# Altium PCB Receiver_PCB.PcbDoc
Units mm, origin at the board's own origin, x right, y up, seen from the top; angles counter-clockwise.
Board outline 78.87 x 88.65 mm, 2 copper layers (Top Layer, Bottom Layer); 16 components, 35 nets, 105 pads, 10 vias.
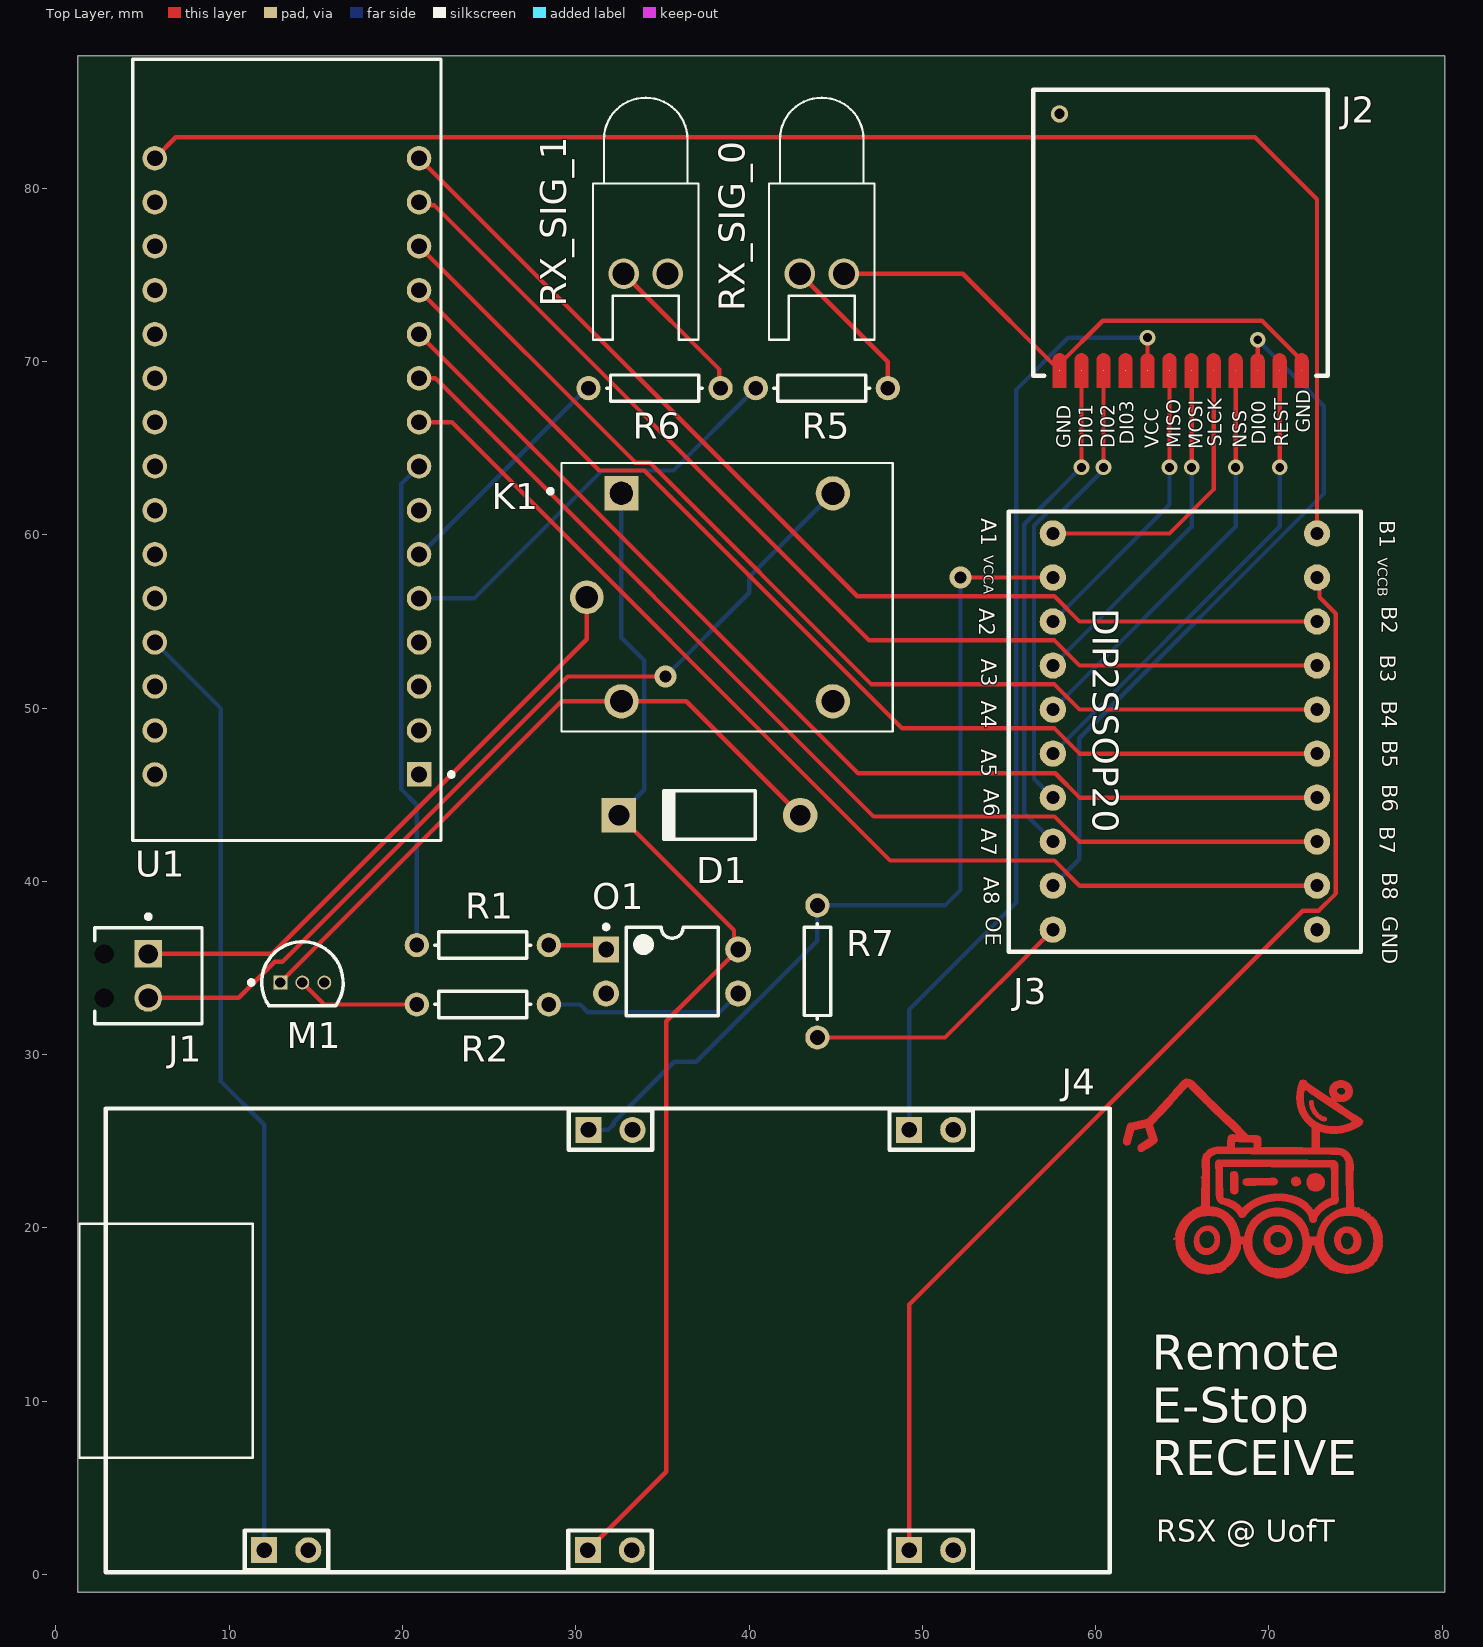
[diagram p0: Top Layer view]
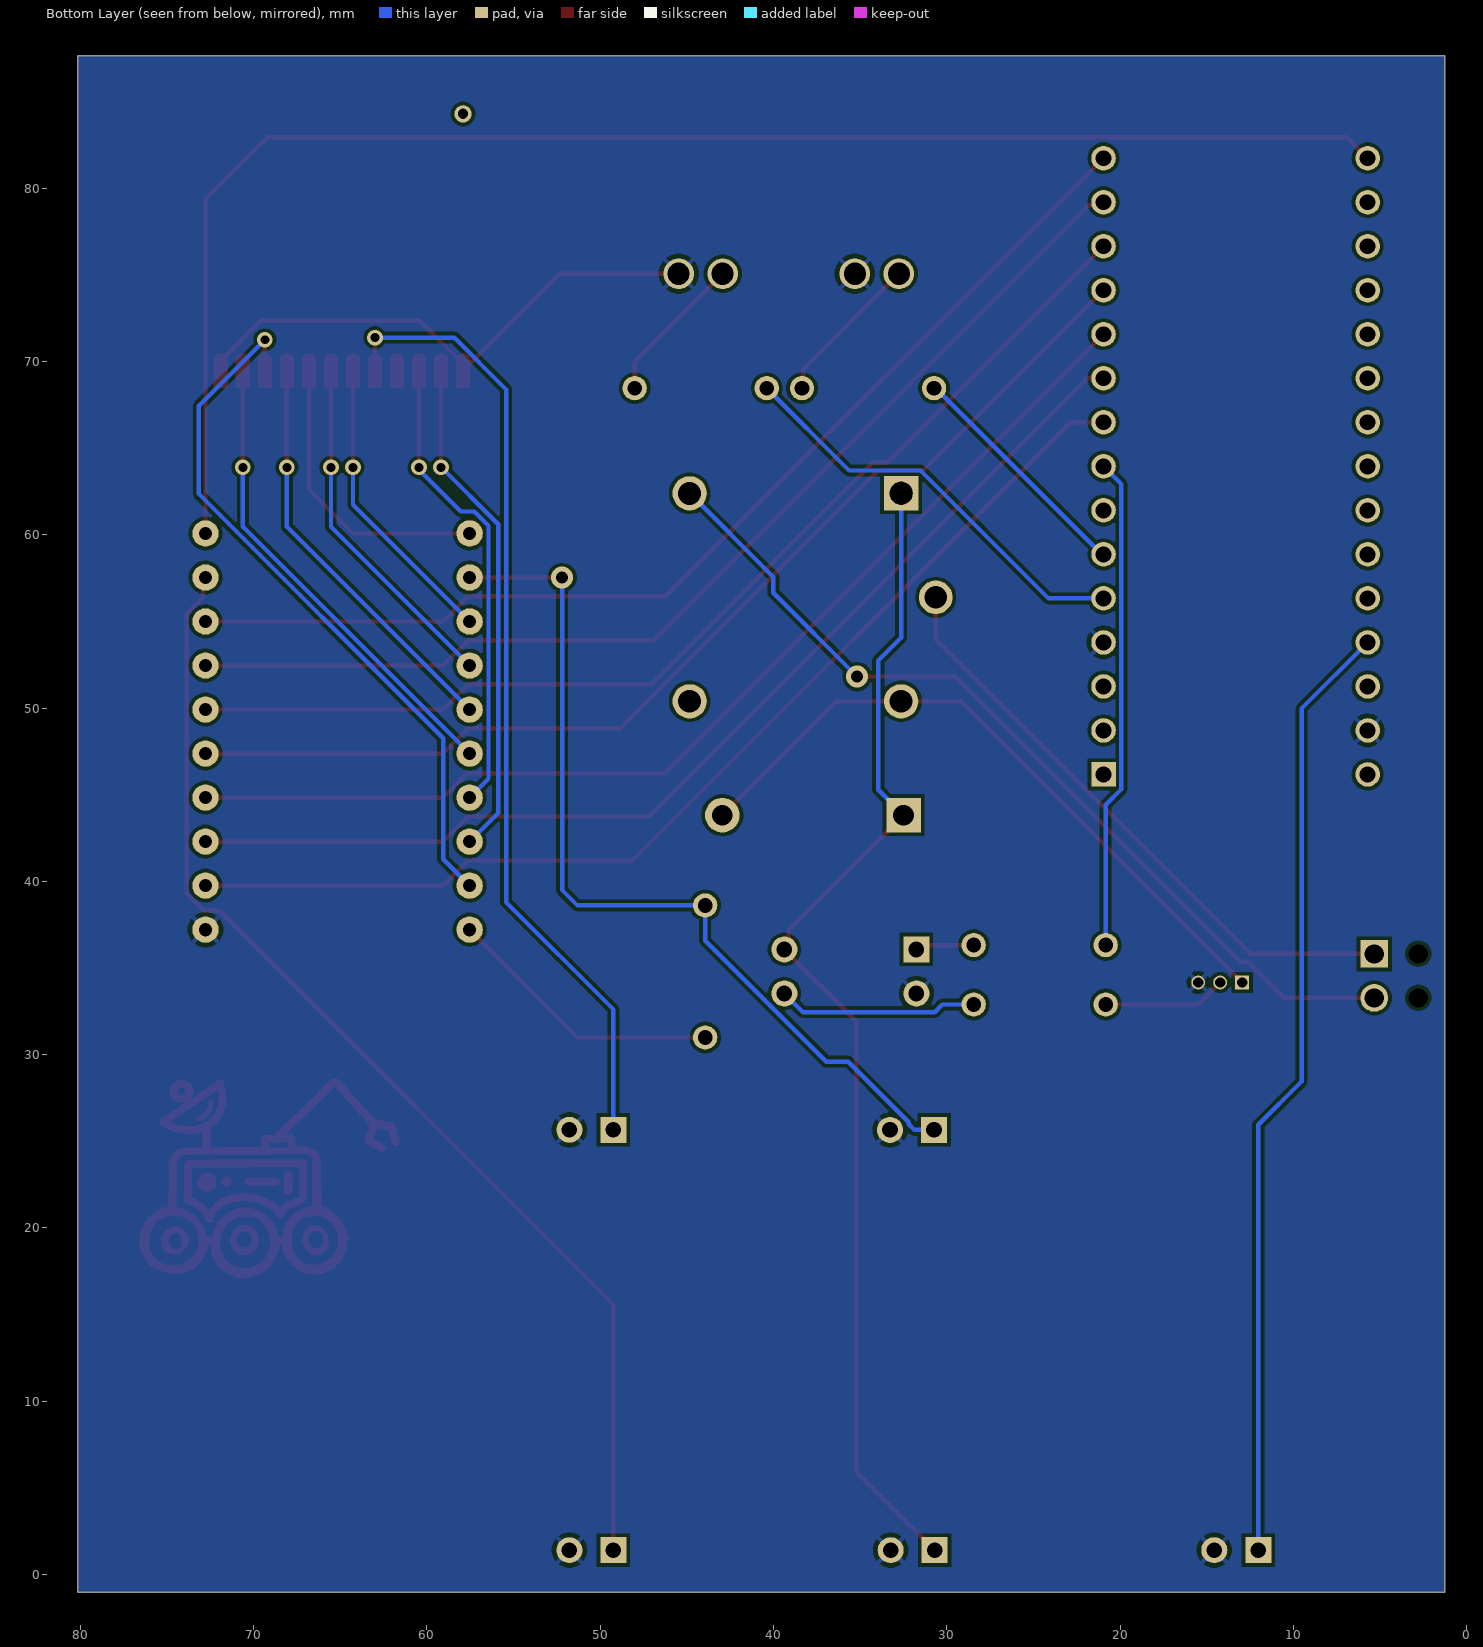
[diagram p1: Bottom Layer view, seen from below]

## Layer stack, top to bottom
Top Solder: solder mask 0.0102, Solder Resist, Dk 3.5
Top Layer: signal copper 0.0356
Dielectric 1: dielectric 0.32, FR-4, Dk 4.8
Bottom Layer: signal copper 0.0356
Bottom Solder: solder mask 0.0102, Solder Resist, Dk 3.5

## Board outline
1.27,-1.016 80.137,-1.016 80.137,87.63 1.27,87.63

## Design rules (kind name [scope] priority, off if disabled: settings)
Clearance [All] p1: gap=0.2 ignorepadtopadclearanceinfootprint=FALSE
PolygonConnect [All] p1: connectstyle=Relief reliefconductorwidth=0.254 reliefentries=4 polygonreliefangle="45 Angle" airgapwidth=0.254
RoutingVias [All] p1: holewidth=0.711 width=1.27 viastyle="Through Hole" minholewidth=0.3 minwidth=0.5 maxholewidth=0.711 maxwidth=1.27
SilkToSolderMaskClearance [IsPad] p1: minsilkscreentomaskgap=0.15 clearancetoexposedcopper=TRUE
SolderMaskExpansion [All] p1: expansion=0.102 istentingtop=FALSE
Width [All] p1: maxlimit=0.254 minlimit=0.254 preferedwidth=0.254
29 further rules are at their usual default settings.

## Components (designator, comment, footprint, x,y, rotation, side; value= is the part's Value field where it differs from the comment)
D1 "Diode 1N4007" DO-41 37.719,43.815 r180 top
J1 "1725656" PHOE-1725656-2 5.334,34.544 r270 top
J2 "Header 12" "LORA SX1278" 56.388,69.169 r0 top
J3 "Logic_Shift" DIP2SSOP20 72.771,60.071 r270 top
J4 "Header 6X2" "3.3V/5V BATTERY SHIELD" 2.881,0.136 r0 top
K1 "SRD-05VDC-SL-C" RELAY_SRD-05VDC-SL-C 38.735,56.388 r0 top
M1 "P2N2222AG" ONSC-TO-92-3-29-11 14.224,34.163 r0 top
O1 "LTV-817" LTST-LTV-817-4 35.56,34.798 r0 top
R1 "Res1" AXIAL-0.3 24.638,36.322 r180 top value=1K
R2 "Res1" AXIAL-0.3 24.638,32.893 r180 top value=1K
R5 "Res1" AXIAL-0.3 44.196,68.453 r180 top value=1K
R6 "Res1" AXIAL-0.3 34.544,68.453 r180 top value=1K
R7 "Res1" AXIAL-0.3 43.942,34.798 r90 top value=1K
RX_SIG_0 "Green_LED" LED-0 44.196,75.057 r180 top
RX_SIG_1 "Red_LED" LED-0 34.036,75.057 r180 top
U1 "A000005" FP-A000005-MFG 13.335,64.897 r180 top

## Footprints (in the part's own frame and the unit in brackets; to place one, negate y for a bottom-side part, rotate by r counter-clockwise, add the part's x,y. Pads: shape width x height; smd on the part's side, far side on the other; paste and mask are expansions set on the pad)
"3.3V/5V BATTERY SHIELD" [mm]
  rect 1.5x1.5 hole 0.9: 1(9.144,1.27) 2(27.853,25.518) 5(27.813,1.27) 6(46.355,25.527) 9(46.355,1.27)
  round 1.5 hole 0.9: 3(11.684,1.27) 4(30.393,25.518) 7(30.353,1.27) 8(48.895,25.527) 11(48.895,1.27)
  silkscreen extent -1.52,0 57.94,26.75
AXIAL-0.3 [mm] "Axial Device, Thru-Hole; 2 Leads; 0.3 in Pin Spacing"
  round 1.4 hole 0.85: 1(-3.81,0) 2(3.81,0)
  silkscreen extent -2.77,-0.76 2.77,0.76
DIP2SSOP20 [mil]
  round 60 hole 30: 1(0,-600) 2(100,-600) 3(200,-600) 4(300,-600) 5(400,-600) 6(500,-600) 7(600,-600) 8(700,-600) 9(800,-600) 10(900,-600) 11(900,0) 12(800,0) 13(700,0) 14(600,0) 15(500,0) 16(400,0) 17(300,0) 18(200,0) 19(100,0) 20(0,0)
  silkscreen extent -50,-700 950,100
DO-41 [mm] "Diode, Axial; Body 5.2 x 2.7 mm (LxDia. max), Lead Dia. 0.86 mm (max)"
  round 2 hole 1.2: 1(-5.23,0)
  rect 2x2 hole 1.2: 2(5.23,0)
  silkscreen extent -2.65,-1.4 2.75,1.4
FP-A000005-MFG [mil]
  rect 55.67x55.67 hole 35.98 paste-39370.1 mask+0: 1(-300,737.5)
  round 55.67 hole 35.98 paste-39370.1 mask+0: 2(-300,637.5) 3(-300,537.5) 4(-300,437.5) 5(-300,337.5) 6(-300,237.5) 7(-300,137.5) 8(-300,37.5) 9(-300,-62.5) 10(-300,-162.5) 11(-300,-262.5) 12(-300,-362.5) 13(-300,-462.5) 14(-300,-562.5) 15(-300,-662.5) 16(300,-662.5) 17(300,-562.5) 18(300,-462.5) 19(300,-362.5) 20(300,-262.5) 21(300,-162.5) 22(300,-62.5) 23(300,37.5) 24(300,137.5) 25(300,237.5) 26(300,337.5) 27(300,437.5) 28(300,537.5) 29(300,637.5) 30(300,737.5)
  silkscreen extent -379,-888 350,888, body extent -354,-891 354,891, height 10
LED-0 [mil] "LED; 2 Leads"
  round 70 hole 50: 1(50,0) 2(-50,0)
  silkscreen extent -120,-400 120,150
"LORA SX1278" [mil]
  round 1 smd: 1(610,11.81) 2(560,11.81) 3(510,11.81) 4(460,11.81) 5(410,11.81) 6(360,11.81) 7(310,11.81) 8(260,11.81) 9(210,11.81) 10(160,11.81) 11(110,11.81) 12(60,11.81)
  round 39.37 hole 23.62: ANT(60,595)
  Top Layer region: 44.25,-27.56 75.75,-27.56 75.75,35.43 74.55,41.46 71.14,46.57 66.03,49.98 60,51.18 60,51.18 53.97,49.98 48.86,46.57 45.45,41.46 44.25,35.43 44.25,35.43
  Top Layer region: 144.25,-27.56 175.75,-27.56 175.75,35.43 174.55,41.46 171.14,46.57 166.03,49.98 160,51.18 160,51.18 153.97,49.98 148.86,46.57 145.45,41.46 144.25,35.43 144.25,35.43
  Top Layer region: 94.25,-27.56 125.75,-27.56 125.75,35.43 124.55,41.46 121.14,46.57 116.03,49.98 110,51.18 110,51.18 103.97,49.98 98.86,46.57 95.45,41.46 94.25,35.43 94.25,35.43
  Top Layer region: 544.25,-27.56 575.75,-27.56 575.75,35.43 574.55,41.46 571.14,46.57 566.03,49.98 560,51.18 560,51.18 553.97,49.98 548.86,46.57 545.45,41.46 544.25,35.43 544.25,35.43
  Top Layer region: 494.25,-27.56 525.75,-27.56 525.75,35.43 524.55,41.46 521.14,46.57 516.03,49.98 510,51.18 510,51.18 503.97,49.98 498.86,46.57 495.45,41.46 494.25,35.43 494.25,35.43
  Top Layer region: 444.25,-27.56 475.75,-27.56 475.75,35.43 474.55,41.46 471.14,46.57 466.03,49.98 460,51.18 460,51.18 453.97,49.98 448.86,46.57 445.45,41.46 444.25,35.43 444.25,35.43
  Top Layer region: 394.25,-27.56 425.75,-27.56 425.75,35.43 424.55,41.46 421.14,46.57 416.03,49.98 410,51.18 410,51.18 403.97,49.98 398.86,46.57 395.45,41.46 394.25,35.43 394.25,35.43
  Top Layer region: 344.25,-27.56 375.75,-27.56 375.75,35.43 374.55,41.46 371.14,46.57 366.03,49.98 360,51.18 360,51.18 353.97,49.98 348.86,46.57 345.45,41.46 344.25,35.43 344.25,35.43
  Top Layer region: 294.25,-27.56 325.75,-27.56 325.75,35.43 324.55,41.46 321.14,46.57 316.03,49.98 310,51.18 310,51.18 303.97,49.98 298.86,46.57 295.45,41.46 294.25,35.43 294.25,35.43
  Top Layer region: 244.25,-27.56 275.75,-27.56 275.75,35.43 274.55,41.46 271.14,46.57 266.03,49.98 260,51.18 260,51.18 253.97,49.98 248.86,46.57 245.45,41.46 244.25,35.43 244.25,35.43
  Top Layer region: 194.25,-27.56 225.75,-27.56 225.75,35.43 224.55,41.46 221.14,46.57 216.03,49.98 210,51.18 210,51.18 203.97,49.98 198.86,46.57 195.45,41.46 194.25,35.43 194.25,35.43
  Top Layer region: 594.25,-27.56 625.75,-27.56 625.75,35.43 624.55,41.46 621.14,46.57 616.03,49.98 610,51.18 610,51.18 603.97,49.98 598.86,46.57 595.45,41.46 594.25,35.43 594.25,35.43
  silkscreen extent 0,0 669,650
LTST-LTV-817-4 [mm] "DIP, 4-Leads, Body 7x5.1mm, Pitch 2.54mm"
  rect 1.5x1.5 hole 0.9: 1(-3.81,1.27)
  round 1.5 hole 0.9: 2(-3.81,-1.27) 3(3.81,-1.27) 4(3.81,1.27)
  silkscreen extent -3.93,-2.55 2.65,2.69, body extent -3.95,-2.55 3.95,2.55, height 4.5
ONSC-TO-92-3-29-11 [mm] "TO, 3-Leads, Body Dia 4.7mm, Pitch 1.27mm"
  rect 0.8x0.8 hole 0.6: 1(-1.27,0)
  round 0.8 hole 0.6 paste+0: 2(0,0)
  round 0.8 hole 0.6: 3(1.27,0)
  silkscreen extent -3.07,-1.34 2.35,2.35, body extent -2.35,-1.33 2.36,2.36, height 7.87
PHOE-1725656-2 [mm] "Connector, 2-Leads, Body 6.2x5.4mm, Pitch 2.54mm"
  rect 1.6x1.6 hole 1.1: 1(-1.27,0)
  round 1.6 hole 1.1: 2(1.27,0)
  round 0 hole 1.1 unplated: MH1(-1.27,-2.54) MH2(1.27,-2.54)
  silkscreen extent -3.54,-3.1 2.77,3.1, body extent -2.77,-3.1 2.77,3.1, height 9
RELAY_SRD-05VDC-SL-C [mm]
  rect 1.98x1.98 hole 1.32 paste+0: A1(-6.1,6)
  round 1.98 hole 1.32: A2(-6.1,-6) NC(6.1,6) NO(6.1,-6)
  round 1.935 hole 1.29: COM(-8.1,0)
  silkscreen extent -10.3,-7.75 9.55,7.75, body extent -9.6,-7.8 9.6,7.8, height 15.8

## Part data
D1: "1 Amp General Purpose Rectifier", Code_JEDEC=DO-204-AL, ComponentLink1Description="Manufacturer Link", ComponentLink1URL=http://www.fairchildsemi.com/, ComponentLink2Description=Datasheet, ComponentLink2URL=http://www.fairchildsemi.com/ds/1N%2F1N4001.pdf, DatasheetVersion=1998, LatestRevisionDate=17-Jul-2002, LatestRevisionNote="Re-released for DXP Platform.", PackageDescription="Diode, Axial; Body 5.2 x 2.7 mm (LxDia. max), Lead Dia. 0.86 mm (max)", PackageReference=DO-41, PackageVersion=Aug-1999, Published=8-Jun-2000, Publisher="Altium Limited"
J1: library part CMP-2000-05299-1, "Male Header, Pitch 2.54 mm, 1 x 2 Position, Height 9 mm, Tail Length 3.5 mm", Colour=Green, Manufacturer="Phoenix Contact", Content=250pc(s), Datasheet URL=http://datasheet.octopart.com/1725656-Phoenix-Contact-datasheet-5302866.pdf, Datasheet Version=Apr-08, Industrial packaging=Yes, Manufacturer part No.=1725656, Manufacturer URL=http://www.phoenixcontact.com/, Number of Contacts=2, Pitch=2.54mm, Type=MPT0,5/2-2,54
J2: "Header, 12-Pin", LatestRevisionDate=17-Jul-2002, LatestRevisionNote="Re-released for DXP Platform.", Publisher="Altium Limited"
J3: library part "Header 10X2", "Header, 10-Pin, Dual row", LatestRevisionDate=17-Jul-2002, LatestRevisionNote="Re-released for DXP Platform.", Publisher="Altium Limited"
J4: "Header, 6-Pin, Dual row", LatestRevisionDate=17-Jul-2002, LatestRevisionNote="Re-released for DXP Platform.", Publisher="Altium Limited"
K1: "5V Trigger Relay Module For Arduino And Raspberry Pi 5V Trigger Relay Module For Arduino And Raspberry Pi", Package="NON STANDARD-5 Songle Relay", Availability="Not in stock", Check_prices=https://www.snapeda.com/parts/SRD-05VDC-SL-C/Songle+Relay/view-part/?ref=eda, MF="Songle Relay", MP=SRD-05VDC-SL-C, Price=None, SnapEDA_Link=https://www.snapeda.com/parts/SRD-05VDC-SL-C/Songle+Relay/view-part/?ref=snap
M1: library part CMP-1048-01402-1, "Amplifier Transistor, NPN Silicon, 3-Pin TO-92, Pb-Free, Bulk Box", Manufacturer="On Semiconductor", ComponentLink1Description="Manufacturer URL", ComponentLink1URL=http://www.onsemi.com/, ComponentLink2Description=Datasheet, ComponentLink2URL=http://www.onsemi.com/pub_link/Collateral/P2N2222A-D.PDF, ComponentLink3Description="Package Specification", ComponentLink3URL=http://www.onsemi.cn/pub_link/Collateral/2N6426-D.PDF, DatasheetVersion="Rev. 7", fT Min (MHz)=300, IC Continuous (A)=0.6, Mounting Technology="Through Hole", PackageDescription="3-Pin Transistor Outline, Body 4.825 x 3.685 mm, Pitch 1.27 mm", PackageReference=TO-92-3-29-11_AM_SL, PackageVersion="Rev. AM", Packing="Bulk Box", PartNumber=P2N2222AG, Polarity=NPN, RoHS=TRUE
O1: library part CMP-2000-06632-1, "Photocoupuler, 50 mA Forward Current, 1.2 V Forward Voltage, -50 to 110 degC, 4-Pin DIP, RoHS, Tube", Manufacturer=Lite-On, Maximum Collector Current=50mA, Maximum Collector Emitter Saturation Voltage=200mV, Maximum Collector Emitter Voltage=35V, Maximum Current Transfer Ratio=600%, Maximum Forward Voltage=1.4V, Maximum Operating Temperature=100C, Maximum Power Dissipation=200mW, Maximum Reverse Voltage=6V, Minimum Current Transfer Ratio=50%, Minimum Isolation Voltage=5000Vrms, Minimum Operating Temperature=-30C, Package Description="4-Pin Double In-line Package, Body 6.5 x 4.6 mm, Pitch 2.54 mm", Supplier_Package=PDIP, Typical Forward Voltage=1.2V, Datasheet URL=http://optoelectronics.liteon.com/upload/download/DS70-2012-0050/S_110_LTV-8X7%20series%200915.pdf, Datasheet Version="Rev. E, 10/2015", Family=LTV817, Input Type=DC, Manufacturer URL=http://www.us.liteon.com/, Maximum Fall Time=18us, Maximum Input Current=50mA, Maximum Rise Time=18us, Mounting=ThroughHole, Mounting Technology=ThroughHole, Number of Channels per Chip=1, Output Device=Transistor, Output Type=DC, Package Reference=LTV-817, Pin_Count=4, Product Height=3.5mm, Product Length=4.6mm, Product Type=TransistorandPhotovoltaicOutputPhotoCouplers, Product Width=6.5mm, Typical Fall Time=3us, Typical Rise Time=4us
R1 R2 R5 R6 R7: "Resistor", LatestRevisionDate=17-Jul-2002, LatestRevisionNote="Re-released for DXP Platform.", PackageDescription="Axial Device, Thru-Hole; 2 Leads; 0.3 in Pin Spacing", PackageReference=AXIAL-0.3, Published=8-Jun-2000, Publisher="Altium Limited"
RX_SIG_0 RX_SIG_1: library part LED0, "Typical INFRARED GaAs LED", LatestRevisionDate=08-Jul-2005, LatestRevisionNote="Mech Layer 1 removed.", PackageDescription="LED; 2 Leads", PackageReference=LED-0, Published=8-Jun-2000, Publisher="Altium Limited"
U1: library part CMP-189986-000002-1, "ARDUINO NANO ATMEGA328 EVAL BRD", Operating Supply Voltage=12V, Package Quantity=50, Core Architecture=AVR, Data Bus Width=8b, Evaluation Kit=Yes, Height=0.25inch, Interface=I2C, Length=7inch, Number of Bits=8, Packaging=Bulk, REACH SVHC="No SVHC", Series="AVR® ATmega", Weight=0.358383oz, Width=5inch

## Via types
v1: diameter 0.9, hole 0.5, Top Layer to Bottom Layer, 8 vias
v2: diameter 1.27, hole 0.711, Top Layer to Bottom Layer, 2 vias

## Nets (pads, with @x,y where several pads share a name; then routed paths per layer and width w, separated by ;. In a path a pad name is that pad's centre, name@x,y a point inside that pad or via, vN(x,y) a via of type N, cw(c..) or ccw(c..) an arc to the next point about the centre after c; other vN are vias at no path point)
DI03: J2.9
GND: J2.1 J2.12 J3.11 J4.3 J4.4 J4.7 J4.8 J4.11 M1.3 O1.2 RX_SIG_0.2 RX_SIG_1.2 U1.4 U1.29 | length 31.7
  Top Layer w0.254: RX_SIG_0.2 52.324,75.057 J2.12 57.912,69.85 60.412,72.35 69.592,72.35 71.882,70.06 J2.1
NetD1_1: D1.1 K1.A2 M1.1 | length 39.4
  Top Layer w0.254: M1.1 29.179,50.388 K1.A2 36.376,50.388 D1.1
NetD1_2: D1.2 J4.5 K1.A1 O1.4 | length 68.6
  Top Layer w0.254: J4.5 35.224,5.936 35.224,31.922 O1.4 39.132,36.306 39.132,37.172 D1.2
  Bottom Layer w0.254: D1.2 33.952,45.278 33.952,52.743 32.635,54.06 K1.A1
NetJ1_1: J1.1 K1.COM | length 35.2
  Top Layer w0.254: J1.1 12.481,35.814 30.635,53.968 K1.COM
NetJ1_2: J1.2 K1.NC | length 52.1
  Top Layer w0.254: J1.2 10.553,33.274 12.639,35.36 13.074,35.36 29.53,51.816 v2(35.179,51.816)
  Bottom Layer w0.254: v2(35.179,51.816) 40.008,56.645 40.008,57.561 K1.NC
NetJ2_2: J2.2 J3.6 | length 27.5
  Top Layer w0.254: v1(70.612,63.881) J2.2
  Bottom Layer w0.254: J3.6 70.612,60.452 v1(70.612,63.881)
NetJ2_3: J2.3 J3.9 | length 41.3
  Top Layer w0.254: J2.3 v1(69.342,71.247)
  Bottom Layer w0.254: J3.9 59.055,41.275 59.055,48.253 73.152,62.35 73.152,67.437 v1(69.342,71.247)
NetJ2_4: J2.4 J3.5 | length 23.9
  Top Layer w0.254: v1(68.072,63.881) J2.4
  Bottom Layer w0.254: J3.5 68.072,60.452 v1(68.072,63.881)
NetJ2_5: J2.5 J3.1 | length 17.2
  Top Layer w0.254: J3.1 64.262,60.071 66.802,62.611 J2.5
NetJ2_6: J2.6 J3.4 | length 20.3
  Top Layer w0.254: v1(65.532,63.881) J2.6
  Bottom Layer w0.254: J3.4 65.532,60.452 v1(65.532,63.881)
NetJ2_7: J2.7 J3.3 | length 17.3
  Top Layer w0.254: v1(64.262,63.881) J2.7
  Bottom Layer w0.254: J3.3 64.262,61.722 v1(64.262,63.881)
NetJ2_8: J2.8 J4.6 | length 56
  Top Layer w0.254: J2.8 v1(62.992,71.374)
  Bottom Layer w0.254: J4.6 49.236,32.599 55.426,38.789 55.426,68.38 58.42,71.374 v1(62.992,71.374)
NetJ2_10: J2.10 J3.7 | length 27.2
  Top Layer w0.254: v1(60.452,63.881) J2.10
  Bottom Layer w0.254: 56.443,60.029 cw(c56.189,60.02) 56.443,60.015 56.442,59.971 ccw(c56.696,59.966) 56.442,59.967 56.442,45.92 J3.7 ; 56.442,60.03 56.442,60.522 57.261,61.341 58.039,61.341 60.452,63.754 v1(60.452,63.881)
NetJ2_11: J2.11 J3.8 | length 29.2
  Top Layer w0.254: v1(59.182,63.881) J2.11
  Bottom Layer w0.254: J3.8 55.88,43.942 55.88,60.602 59.159,63.881 v1(59.182,63.881)
NetJ3_2: J3.2 J4.2 R7.2 | length 51.8
  Top Layer w0.254: v2(52.197,57.531) J3.2
  Bottom Layer w0.254: J4.2 31.865,25.654 32.197,25.986 32.197,26.1 35.688,29.591 36.956,29.591 43.942,36.577 R7.2 51.308,38.608 52.197,39.497 v2(52.197,57.531)
NetJ3_10: J3.10 R7.1 | length 16.2
  Top Layer w0.254: R7.1 51.308,30.988 J3.10
NetJ3_12: J3.12 U1.9 | length 62.9
  Top Layer w0.254: U1.9 22.853,66.484 48.135,41.202 57.62,41.202 59.071,39.751 J3.12
NetJ3_13: J3.13 U1.10 | length 62.9
  Top Layer w0.254: U1.10 21.902,69.025 47.185,43.742 57.62,43.742 59.071,42.291 J3.13
NetJ3_14: J3.14 U1.11 | length 62.9
  Top Layer w0.254: U1.11 46.291,46.228 57.674,46.228 59.071,44.831 J3.14
NetJ3_15: J3.15 U1.12 | length 62.9
  Top Layer w0.254: U1.12 31.355,63.705 33.958,63.705 48.841,48.822 57.62,48.822 59.071,47.371 J3.15
NetJ3_16: J3.16 U1.13 | length 62.9
  Top Layer w0.254: U1.13 33.441,64.159 34.266,64.159 47.063,51.362 57.62,51.362 59.071,49.911 J3.16
NetJ3_17: J3.17 U1.14 | length 62.9
  Top Layer w0.254: U1.14 21.121,79.018 21.82,79.018 46.936,53.902 57.62,53.902 59.071,52.451 J3.17
NetJ3_18: J3.18 U1.15 | length 62.9
  Top Layer w0.254: U1.15 46.237,56.442 57.62,56.442 59.071,54.991 J3.18
NetJ3_19: J3.19 J4.9 | length 67.3
  Top Layer w0.254: J4.9 49.236,15.581 71.955,38.3 72.86,38.3 73.86,39.3 73.86,55.442 72.914,56.388 72.914,57.388 J3.19
NetJ3_20: J3.20 U1.16 | length 88.3
  Top Layer w0.254: U1.16 6.921,82.931 69.193,82.931 72.771,79.353 J3.20
NetJ4_1: J4.1 U1.27 | length 55
  Bottom Layer w0.254: U1.27 9.525,49.974 9.525,28.448 12.025,25.948 J4.1
NetM1_2: M1.2 R2.2 | length 7.1
  Top Layer w0.254: M1.2 15.494,32.893 R2.2
NetO1_1: O1.1 R1.1 | length 3.4
  Top Layer w0.254: R1.1 31.496,36.322 O1.1
NetO1_3: O1.3 R2.1 | length 11.6
  Bottom Layer w0.254: R2.1 30.256,32.893 30.698,32.451 38.293,32.451 O1.3
NetR1_2: R1.2 U1.8 | length 28.4
  Bottom Layer w0.254: R1.2 20.828,44.415 19.921,45.322 19.921,62.91 U1.8
NetR5_1: R5.1 RX_SIG_0.1 | length 8.7
  Top Layer w0.254: RX_SIG_0.1 48.006,69.977 R5.1
NetR5_2: R5.2 U1.5 | length 24.5
  Bottom Layer w0.254: U1.5 24.129,56.325 31.51,63.705 35.638,63.705 R5.2
NetR6_1: R6.1 RX_SIG_1.1 | length 8.9
  Top Layer w0.254: RX_SIG_1.1 38.289,69.534 38.289,68.518 R6.1
NetR6_2: R6.2 U1.6 | length 14.1
  Top Layer w0.254: U1.6 U1.6@20.955,58.96 ; R6.2@30.353,68.358 R6.2@30.353,68.453
  Bottom Layer w0.254: U1.6@20.955,58.96 U1.6 21.05,58.864 30.639,68.453 R6.2 ; R6.2@30.353,68.358 R6.2@30.353,68.453
pads on no net: J1.MH1 J1.MH2 J2.ANT K1.NO U1.1 U1.2 U1.3 U1.7 U1.17 U1.18 U1.19 U1.20 U1.21 U1.22 U1.23 U1.24 U1.25 U1.26 U1.28 U1.30

## Polygon pours and split planes (outlines as drawn)
GND on Bottom Layer "GND_L02_P000" (solid, pour order 0): 1.27,87.63 1.27,-1.016 80.137,-1.016 80.137,87.63

## Other copper
Top Layer:
  region: 75.607,20.944 75.607,20.972 75.635,20.972 75.635,20.944
  region: 67.503,17.589 67.475,17.589 67.475,17.617 67.503,17.617
  region: 75.379,21.114 75.379,21.086 75.351,21.086 75.351,21.114
  region: 75.18,21.171 75.123,21.171 75.123,21.2 75.18,21.2
  region: 72.109,17.731 72.109,17.759 72.138,17.759 72.138,17.731
  region: 75.237,21.143 75.209,21.143 75.209,21.171 75.237,21.171
  region: 75.777,20.858 75.777,20.83 75.749,20.83 75.749,20.858
  region: 73.091,26.175 73.006,26.175 73.006,26.204 72.949,26.204 72.949,26.232 72.92,26.232 72.92,26.261 72.863,26.261 72.863,26.289 72.835,26.289 72.835,26.317 72.807,26.317 72.807,26.346 72.75,26.346 72.75,26.374 72.721,26.374 72.721,26.403 72.693,26.403 72.693,26.431 72.664,26.431 72.664,26.488 72.636,26.488 72.636,26.516 72.607,26.516 72.607,26.545 72.579,26.545 72.579,26.573 72.551,26.573 72.551,26.63 72.522,26.63 72.522,26.659 72.494,26.659 72.494,26.715 72.465,26.715 72.465,26.772 72.437,26.772 72.437,26.829 72.408,26.829 72.408,26.886 72.38,26.886 72.38,26.971 72.352,26.971 72.352,27.085 72.323,27.085 72.323,27.313 72.352,27.313 72.352,27.341 72.38,27.341 72.38,27.369 72.522,27.369 72.522,27.341 72.551,27.341 72.551,27.256 72.579,27.256 72.579,27.057 72.607,27.057 72.607,26.971 72.636,26.971 72.636,26.915 72.664,26.915 72.664,26.858 72.693,26.858 72.693,26.801 72.721,26.801 72.721,26.772 72.75,26.772 72.75,26.715 72.778,26.715 72.778,26.687 72.807,26.687 72.807,26.659 72.835,26.659 72.835,26.63 72.863,26.63 72.863,26.573 72.892,26.573 72.892,26.545 72.949,26.545 72.949,26.516 72.977,26.516 72.977,26.488 73.006,26.488 73.006,26.46 73.034,26.46 73.034,26.431 73.091,26.431 73.091,26.403 73.233,26.403 73.233,26.374 73.29,26.374 73.29,26.317 73.318,26.317 73.318,26.204 73.29,26.204 73.29,26.175 73.233,26.175 73.233,26.147 73.091,26.147
  region: 68.072,21.939 67.93,21.939 67.93,21.967 67.873,21.967 67.873,21.996 67.816,21.996 67.816,22.024 67.788,22.024 67.788,22.138 67.759,22.138 67.759,23.161 67.788,23.161 67.788,23.218 67.816,23.218 67.816,23.247 67.93,23.247 67.93,23.275 68.044,23.275 68.044,23.247 68.129,23.247 68.129,23.218 68.157,23.218 68.157,23.161 68.186,23.161 68.186,23.048 68.214,23.048 68.214,22.081 68.186,22.081 68.186,22.024 68.157,22.024 68.157,21.996 68.129,21.996 68.129,21.967 68.072,21.967
  region: 69.209,22.422 68.669,22.422 68.669,22.451 68.612,22.451 68.612,22.479 68.555,22.479 68.555,22.507 68.527,22.507 68.527,22.564 68.498,22.564 68.498,22.735 68.527,22.735 68.527,22.792 68.555,22.792 68.555,22.82 68.612,22.82 68.612,22.849 68.698,22.849 68.698,22.877 70.091,22.877 70.091,22.905 70.29,22.905 70.29,22.877 70.403,22.877 70.403,22.849 70.432,22.849 70.432,22.82 70.46,22.82 70.46,22.792 70.489,22.792 70.489,22.735 70.517,22.735 70.517,22.621 70.489,22.621 70.489,22.564 70.46,22.564 70.46,22.507 70.403,22.507 70.403,22.479 70.347,22.479 70.347,22.451 69.238,22.451 69.238,22.422
  region: 71.768,22.849 71.768,22.82 71.797,22.82 71.797,22.763 71.825,22.763 71.825,22.65 71.854,22.65 71.854,22.593 71.825,22.593 71.825,22.536 71.797,22.536 71.797,22.507 71.768,22.507 71.768,22.479 71.74,22.479 71.74,22.451 71.683,22.451 71.683,22.422 71.598,22.422 71.598,22.394 71.484,22.394 71.484,22.422 71.427,22.422 71.427,22.451 71.37,22.451 71.37,22.479 71.342,22.479 71.342,22.536 71.313,22.536 71.313,22.593 71.285,22.593 71.285,22.792 71.313,22.792 71.313,22.849 71.342,22.849 71.342,22.877 71.37,22.877 71.37,22.905 71.427,22.905 71.427,22.934 71.484,22.934 71.484,22.962 71.626,22.962 71.626,22.934 71.683,22.934 71.683,22.905 71.74,22.905 71.74,22.877 71.768,22.877
  region: 72.337,23.019 72.337,23.048 72.365,23.048 72.365,23.076 72.422,23.076 72.422,23.105 72.479,23.105 72.479,23.133 72.593,23.133 72.593,23.161 72.763,23.161 72.763,23.133 72.877,23.133 72.877,23.105 72.934,23.105 72.934,23.076 72.991,23.076 72.991,23.048 73.019,23.048 73.019,23.019 73.048,23.019 73.048,22.991 73.076,22.991 73.076,22.962 73.105,22.962 73.105,22.934 73.133,22.934 73.133,22.877 73.161,22.877 73.161,22.849 73.19,22.849 73.19,22.763 73.218,22.763 73.218,22.479 73.19,22.479 73.19,22.394 73.161,22.394 73.161,22.337 73.133,22.337 73.133,22.308 73.105,22.308 73.105,22.28 73.076,22.28 73.076,22.252 73.048,22.252 73.048,22.223 73.019,22.223 73.019,22.195 72.962,22.195 72.962,22.166 72.906,22.166 72.906,22.138 72.849,22.138 72.849,22.109 72.564,22.109 72.564,22.138 72.479,22.138 72.479,22.166 72.422,22.166 72.422,22.195 72.394,22.195 72.394,22.223 72.337,22.223 72.337,22.252 72.308,22.252 72.308,22.28 72.28,22.28 72.28,22.308 72.252,22.308 72.252,22.365 72.223,22.365 72.223,22.422 72.195,22.422 72.195,22.479 72.166,22.479 72.166,22.792 72.195,22.792 72.195,22.877 72.223,22.877 72.223,22.905 72.252,22.905 72.252,22.962 72.28,22.962 72.28,22.991 72.308,22.991 72.308,23.019
  region: 133 vertices and 1 holes, not listed, extent 65.655,18.442 67.162,20.119
  region: 141 vertices and 1 holes, not listed, extent 69.693,18.442 71.342,20.148
  region: 131 vertices and 1 holes, not listed, extent 73.759,18.47 75.322,20.062
  region: 301 vertices and 1 holes, not listed, extent 66.906,20.29 74.014,23.929
  region: 2160 vertices and 7 holes, not listed, extent 61.589,17.105 76.573,28.62

## Silkscreen, mask and mechanical layers (free items; w line width, h text height)
Top Overlay:
  text "Remote  / E-Stop / RECEIVE" at 63.246,5.715 h2.03
  text "RSX @ UofT" at 63.5,1.905 h1.27

## Text inside footprints (layer, text, board x,y; h text height)
J2: Top Overlay "SLCK" at 67.287,65.071 h0.8 r90; Top Overlay "REST" at 71.097,65.071 h0.8 r90; Top Overlay "MOSI" at 66.167,64.933 h0.8 r90; Top Overlay "DI01" at 59.817,64.978 h0.8 r90; Top Overlay "GND" at 58.547,64.978 h0.8 r90; Top Overlay "DI02" at 61.087,64.978 h0.8 r90; Top Overlay "VCC" at 63.627,64.978 h0.8 r90; Top Overlay "MISO" at 64.897,64.978 h0.8 r90; Top Overlay "NSS" at 68.707,64.978 h0.8 r90; Top Overlay "DI03" at 62.207,65.204 h0.8 r90; Top Overlay "DI00" at 69.827,65.204 h0.8 r90; Top Overlay "GND" at 72.367,65.87 h0.8 r90
J3: Top Overlay "DIP2SSOP20" at 59.817,55.753 h1.52 r270; Top Overlay "VCCB" at 76.084,58.673 h1.02 r270; Top Overlay "GND" at 76.217,37.973 h1.52 r270; Top Overlay "OE" at 53.34,37.973 h1.52 r270; Top Overlay "VCCA" at 53.34,58.801 h1.02 r270; Top Overlay "B2" at 76.2,55.88 h1.52 r270; Top Overlay "B8" at 76.217,40.513 h1.52 r270; Top Overlay "B7" at 76.073,43.18 h1.52 r270; Top Overlay "B6" at 76.217,45.593 h1.52 r270; Top Overlay "B5" at 76.217,48.133 h1.52 r270; Top Overlay "B4" at 76.2,50.419 h1.52 r270; Top Overlay "B3" at 76.09,53.086 h1.52 r270; Top Overlay "A1" at 53.086,60.96 h1.52 r270; Top Overlay "A2" at 52.959,55.753 h1.52 r270; Top Overlay "A3" at 53.086,52.832 h1.52 r270; Top Overlay "A4" at 53.086,50.419 h1.52 r270; Top Overlay "A5" at 53.086,47.625 h1.52 r270; Top Overlay "A6" at 53.213,45.339 h1.52 r270; Top Overlay "A7" at 53.086,43.053 h1.52 r270; Top Overlay "A8" at 53.213,40.259 h1.52 r270; Top Overlay "B1" at 76.073,60.833 h1.52 r270